# EAGLE board Project R3T1F20 (EAGLE 7.6.0)

Size 73.58 x 63.39 mm. Coordinates in mm from the lower left corner, seen from the top.
Outline: 0,0 56.82,0 56.82,53.33 0,53.33 0,0
Copper layers (1*16): Top 0.035mm / dielectric 1.5mm / Bottom 0.035mm
Design rules "default": minimum track width 10mil, minimum drill 24mil, track to track 8mil, track to pad 8mil, pad to pad 8mil, via to via 8mil, smd to smd 8mil, copper to edge 40mil, drill to drill 8mil, minimum pad ring 10mil, minimum via ring 8mil, stop-mask expansion 4mil, vias tented up to drill 0mil, thermal gap 10mil

## Footprints (pad centres in the part's own frame; a part is rotated, then mirrored left to right if it is on the bottom)
DC-POWER = drill 0.889 pad 2.54 octagon: + 0,2.54; - 0,-2.54
B25V = drill 0.813 long: A 2.54,0.635; E -2.54,0.635; S 0,0.635
DIP04YL = drill 0.813 long: 1 -3.81,-3.81; 2 -1.27,-3.81; 3 1.27,-3.81; 4 3.81,-3.81; 5 3.81,3.81; 6 1.27,3.81; 7 -1.27,3.81; 8 -3.81,3.81
ARDUINO_UNO = drill 1.016 pad 1.88: 0 63.5,50.8; 1 60.96,50.8; 2 58.42,50.8; 3 55.88,50.8; 3.3V 35.56,2.54; 4 53.34,50.8; 5 50.8,50.8; 5V 38.1,2.54; 6 48.26,50.8; 7 45.72,50.8; 8 41.656,50.8; 9 39.116,50.8; 10 36.576,50.8; 11 34.036,50.8; 12 31.496,50.8; 13 28.956,50.8; A0 50.8,2.54; A1 53.34,2.54; A2 55.88,2.54; A3 58.42,2.54; A4 60.96,2.54; A5 63.5,2.54; AREF 23.876,50.8; GND 26.416,50.8; GND. 43.18,2.54; GND.. 40.64,2.54; I/OREF 30.48,2.54; N/C 27.94,2.54; RESET 33.02,2.54; SCL 18.796,50.8; SDA 21.336,50.8; VIN 45.72,2.54 | hole 3.2: 66.04,7.62; 66.04,35.56; 15.24,50.8; 13.97,2.54
DIL16 = drill 0.813 long: 1 -8.89,-3.81; 2 -6.35,-3.81; 3 -3.81,-3.81; 4 -1.27,-3.81; 5 1.27,-3.81; 6 3.81,-3.81; 7 6.35,-3.81; 8 8.89,-3.81; 9 8.89,3.81; 10 6.35,3.81; 11 3.81,3.81; 12 1.27,3.81; 13 -1.27,3.81; 14 -3.81,3.81; 15 -6.35,3.81; 16 -8.89,3.81

## Placement (x,y rotation side)
BAT1  [DC-POWER]  5,60.88 0 top
Rpot1  250k‎Ω  [B25V]  5,48.18 0 top
SW1  [DIP04YL]  5,35.48 0 top
U2  [ARDUINO_UNO]  5,10.08 0 top
U6  [DIL16]  5,22.78 0 top

## Library data of the parts
BAT1 Rpot1 SW1 U2 U6 = AUTODESK_CIRCUITS_BREADBOARD

## Nets
N$1: U2.6 U6.2
N$2: U6.3
N$3: U6.6
N$4: U2.5 U6.7
N$5: U2.10 U6.10
N$6: U6.11
N$7: U6.14
N$8: U2.11 U6.15
N$9: BAT1.+ U6.8
N$10: Rpot1.S U2.A5
N$11: SW1.3 U2.A3
N$12: SW1.4 U2.A4
N$13: SW1.1 U2.A1
N$14: SW1.2 U2.A2
N$15: BAT1.- Rpot1.A SW1.5 SW1.6 SW1.7 SW1.8 U2.GND. U6.4 U6.5 U6.12 U6.13
N$16: Rpot1.E U2.5V U6.1 U6.9 U6.16

## Tracks (layer width: path | path; a pad name or v marks a point on that pad's centre or on a via)
N$1  (1 unrouted)
N$4  (1 unrouted)
N$5  (1 unrouted)
N$8  (1 unrouted)
N$9  (1 unrouted)
N$10  (1 unrouted)
N$11  (1 unrouted)
N$12  (1 unrouted)
N$13  (1 unrouted)
N$14  (1 unrouted)
N$15  (10 unrouted)
N$16  (4 unrouted)